# Altium PCB skey_footprint.pcbdoc
Units mil, origin at the board's own origin, x right, y up, seen from the top; angles counter-clockwise.
Board outline 1732.52 x 1636 mil, 2 copper layers (Top Layer, Bottom Layer); 1 components, 1 nets, 13 pads, 0 vias.
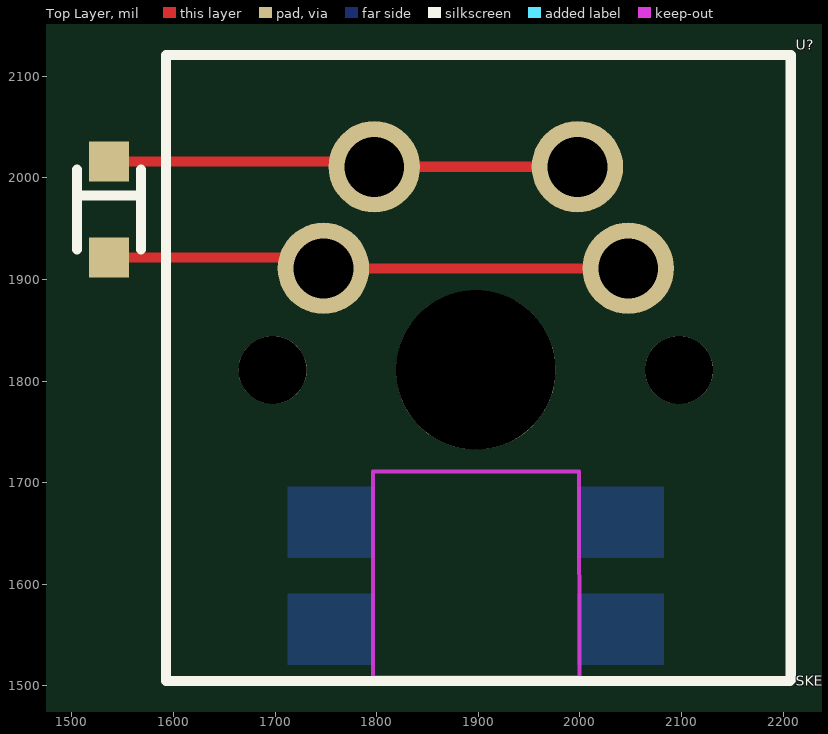
[diagram p0: Top Layer view]
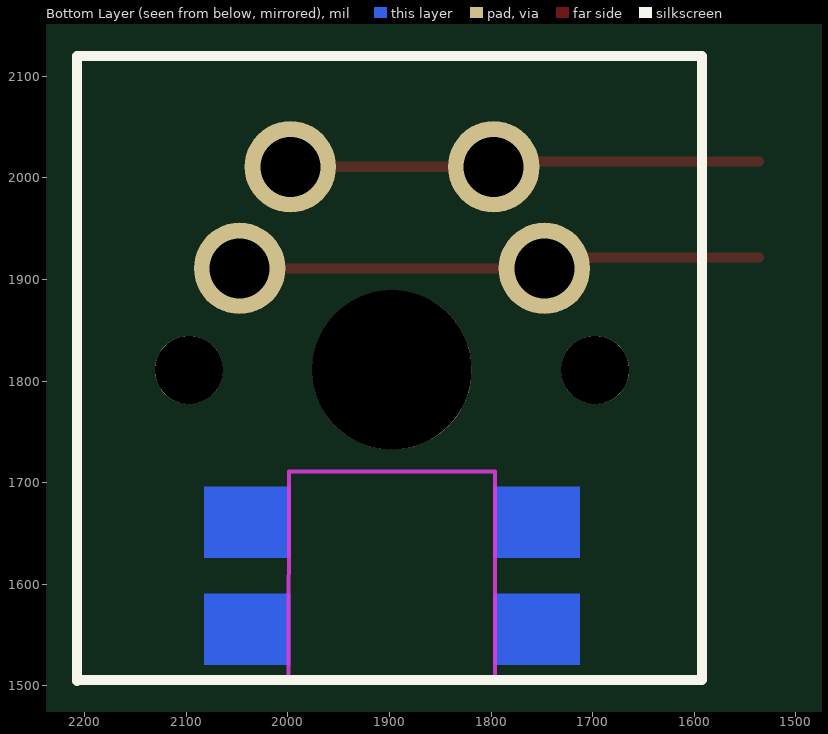
[diagram p1: Bottom Layer view, seen from below]

## Layer stack, top to bottom
Top Layer: signal copper (thickness not stored)
Dielectric: dielectric 12.6, FR-4, Dk 4.8
Bottom Layer: signal copper (thickness not stored)

## Board outline
2732.52,1000 1000,1000 1000,2636 2732.52,2636

## Components (designator, comment, footprint, x,y, rotation, side; value= is the part's Value field where it differs from the comment)
U? "SKEY" SKEY 1856.26,1813 r0 top

## Footprints (in the part's own frame and the unit in brackets; to place one, negate y for a bottom-side part, rotate by r counter-clockwise, add the part's x,y. Pads: shape width x height; smd on the part's side, far side on the other; paste and mask are expansions set on the pad)
SKEY [mil]
  rect 39.37x39.37 smd: 1(-319.76,108.61) 2(-319.76,203.1)
  round 90 hole 59: 1(-108.74,98) 1(191.26,98) 2(-58.74,198) 2(141.26,198)
  round 0 smd far side: 3(-103.62,-152) 4(-103.62,-257) 5(186.14,-257) 6(186.14,-152)
  round 67 hole 67 unplated: ""(-158.74,-2) ""(241.26,-2)
  round 157 hole 157 unplated: ""(41.26,-2)
  Top Layer lines w10: -319.76,108.62 -119.36,108.62 -108.74,98 191.26,98 ; -319.76,203.11 -63.85,203.11 -58.74,198 141.26,198
  Bottom Layer region: 146.14,-117 226.14,-117 226.14,-187 146.14,-187
  Bottom Layer region: 146.14,-222 226.14,-222 226.14,-292 146.14,-292
  Bottom Layer region: -143.62,-222 -63.62,-222 -63.62,-292 -143.62,-292
  Bottom Layer region: -143.62,-117 -63.62,-117 -63.62,-187 -143.62,-187
  Bottom Layer region: -138.74,-117 -58.74,-117 -58.74,-187 -138.74,-187
  Bottom Layer region: -138.74,-222 -58.74,-222 -58.74,-292 -138.74,-292
  Bottom Layer region: 141.26,-222 221.26,-222 221.26,-292 141.26,-292
  Bottom Layer region: 141.26,-117 221.26,-117 221.26,-187 141.26,-187
  Keep-Out Layer lines w3.94: -60.12,-102 142.64,-102 ; -59.92,-102 -59.92,-304.76 142.84,-304.76 ; 142.83,-102 143.23,-304.76
  silkscreen extent -351,-308 351,308

## Nets (pads, with @x,y where several pads share a name; then routed paths per layer and width w, separated by ;. In a path a pad name is that pad's centre, name@x,y a point inside that pad or via, vN(x,y) a via of type N, cw(c..) or ccw(c..) an arc to the next point about the centre after c; other vN are vias at no path point)
null: 
pads on no net: U?. U?.1 U?.2 U?.3 U?.4 U?.5 U?.6

## Silkscreen, mask and mechanical layers (free items; w line width, h text height)
Document:
  lines w0.1: 1865.26,1817 1867.26,1819